# Altium PCB DMC.PcbDoc
Units mm, origin at the board's own origin, x right, y up, seen from the top; angles counter-clockwise.
Board outline 40.92 x 29.24 mm, 4 copper layers (Top Layer, GND, VCC, Bottom Layer), stack 0.603 mm thick; 34 components, 28 nets, 167 pads, 43 vias.
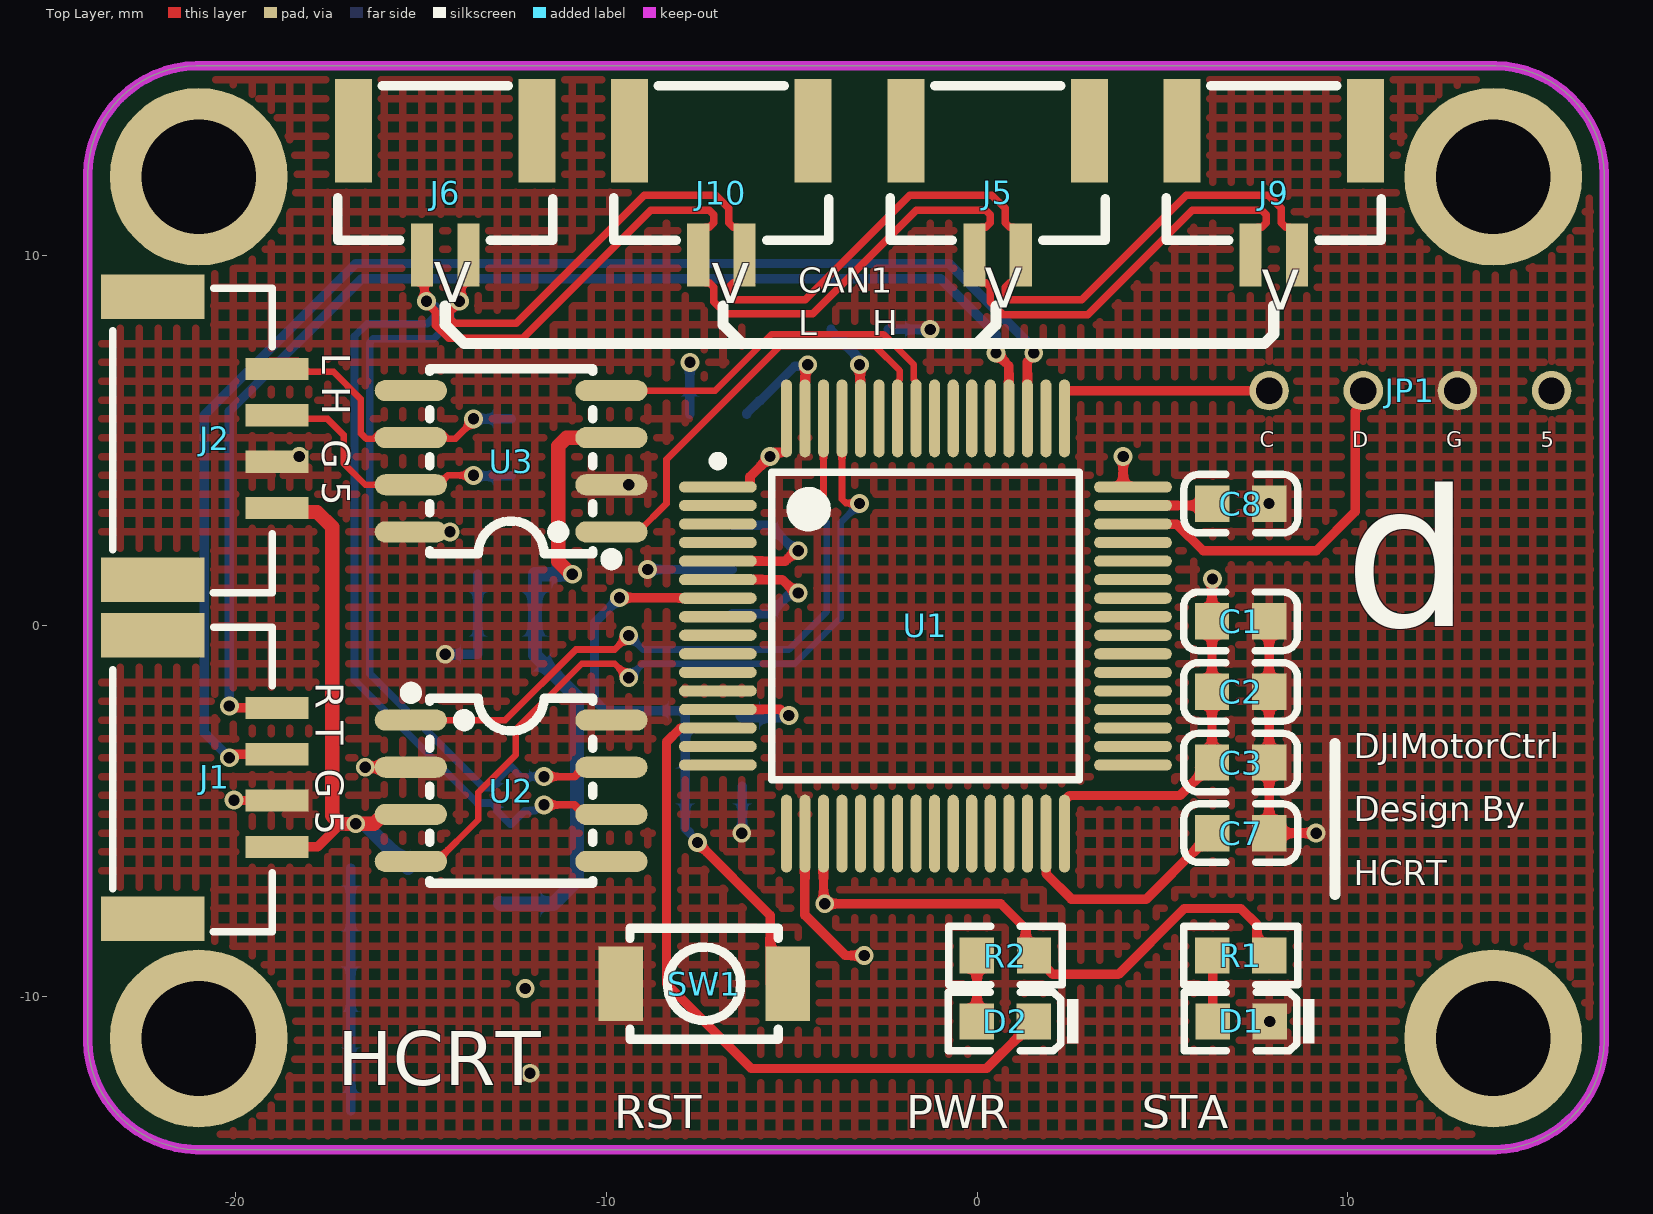
[diagram p0: Top Layer view]
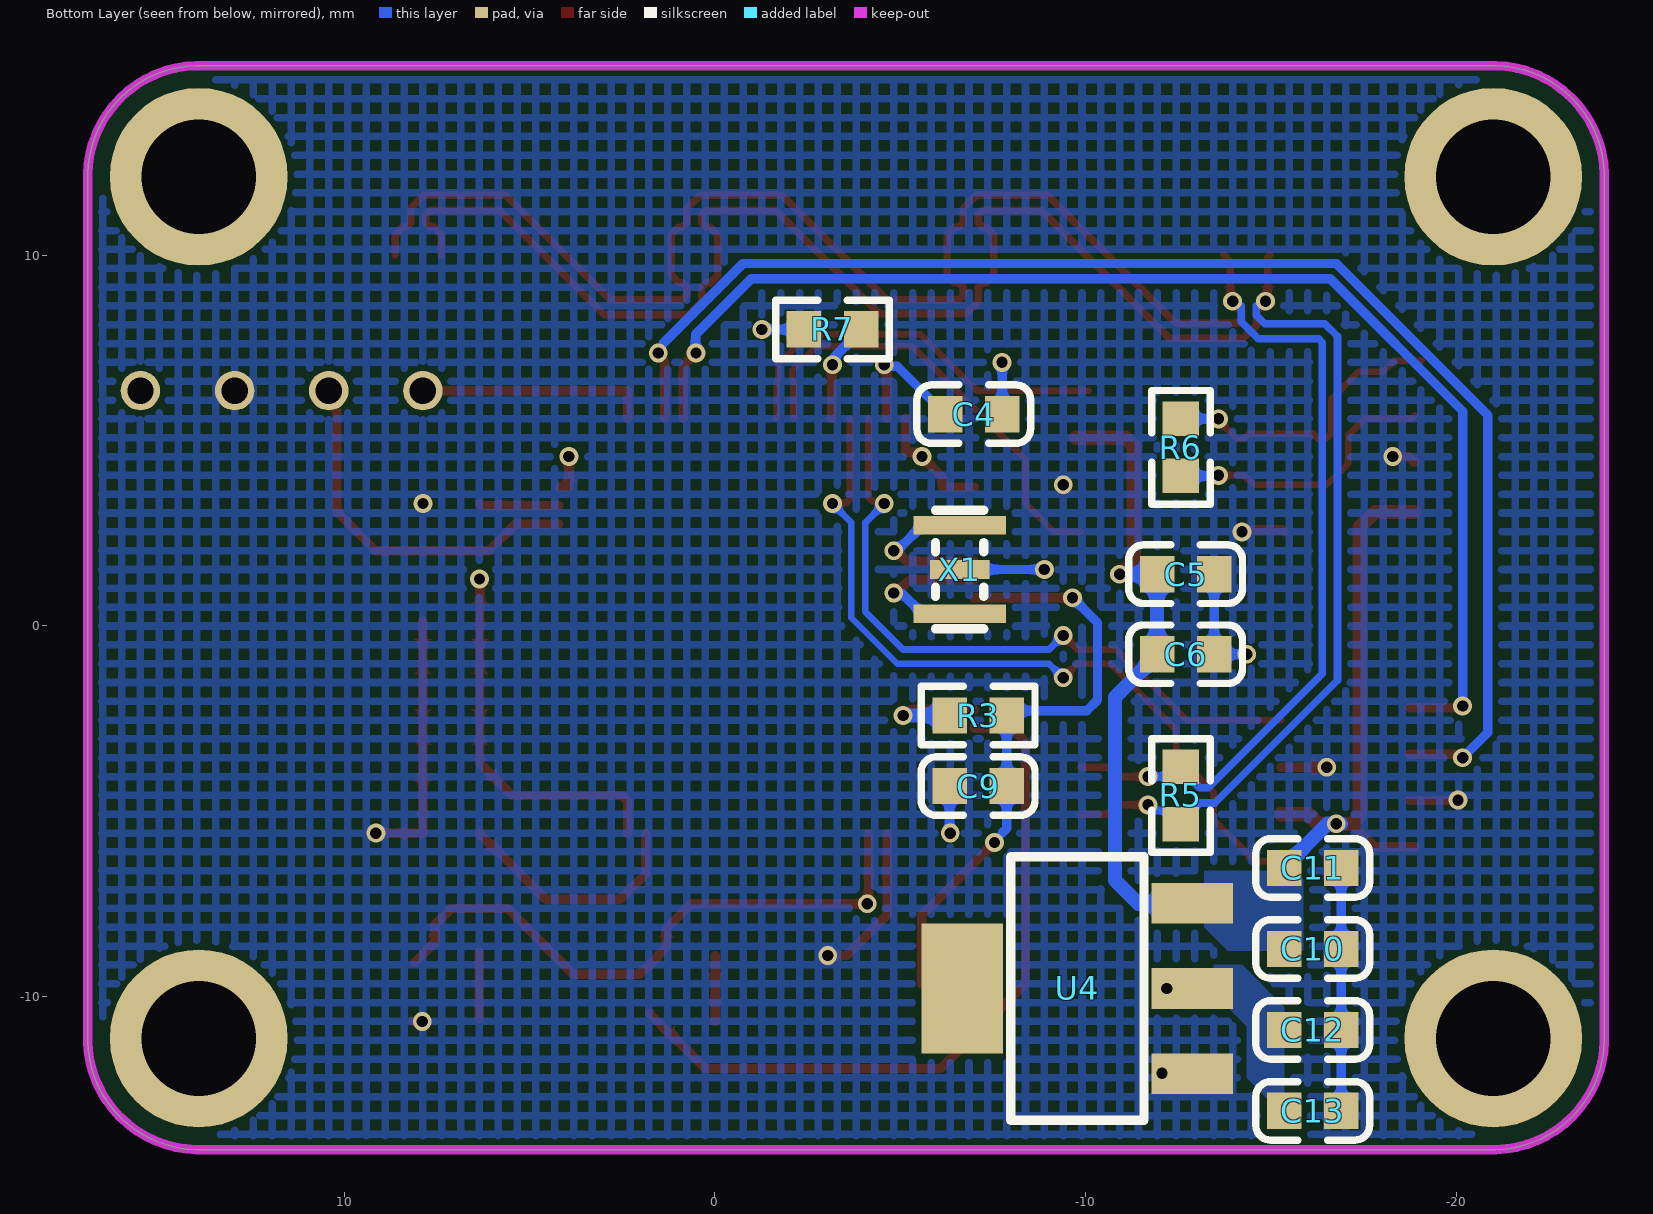
[diagram p1: Bottom Layer view, seen from below]
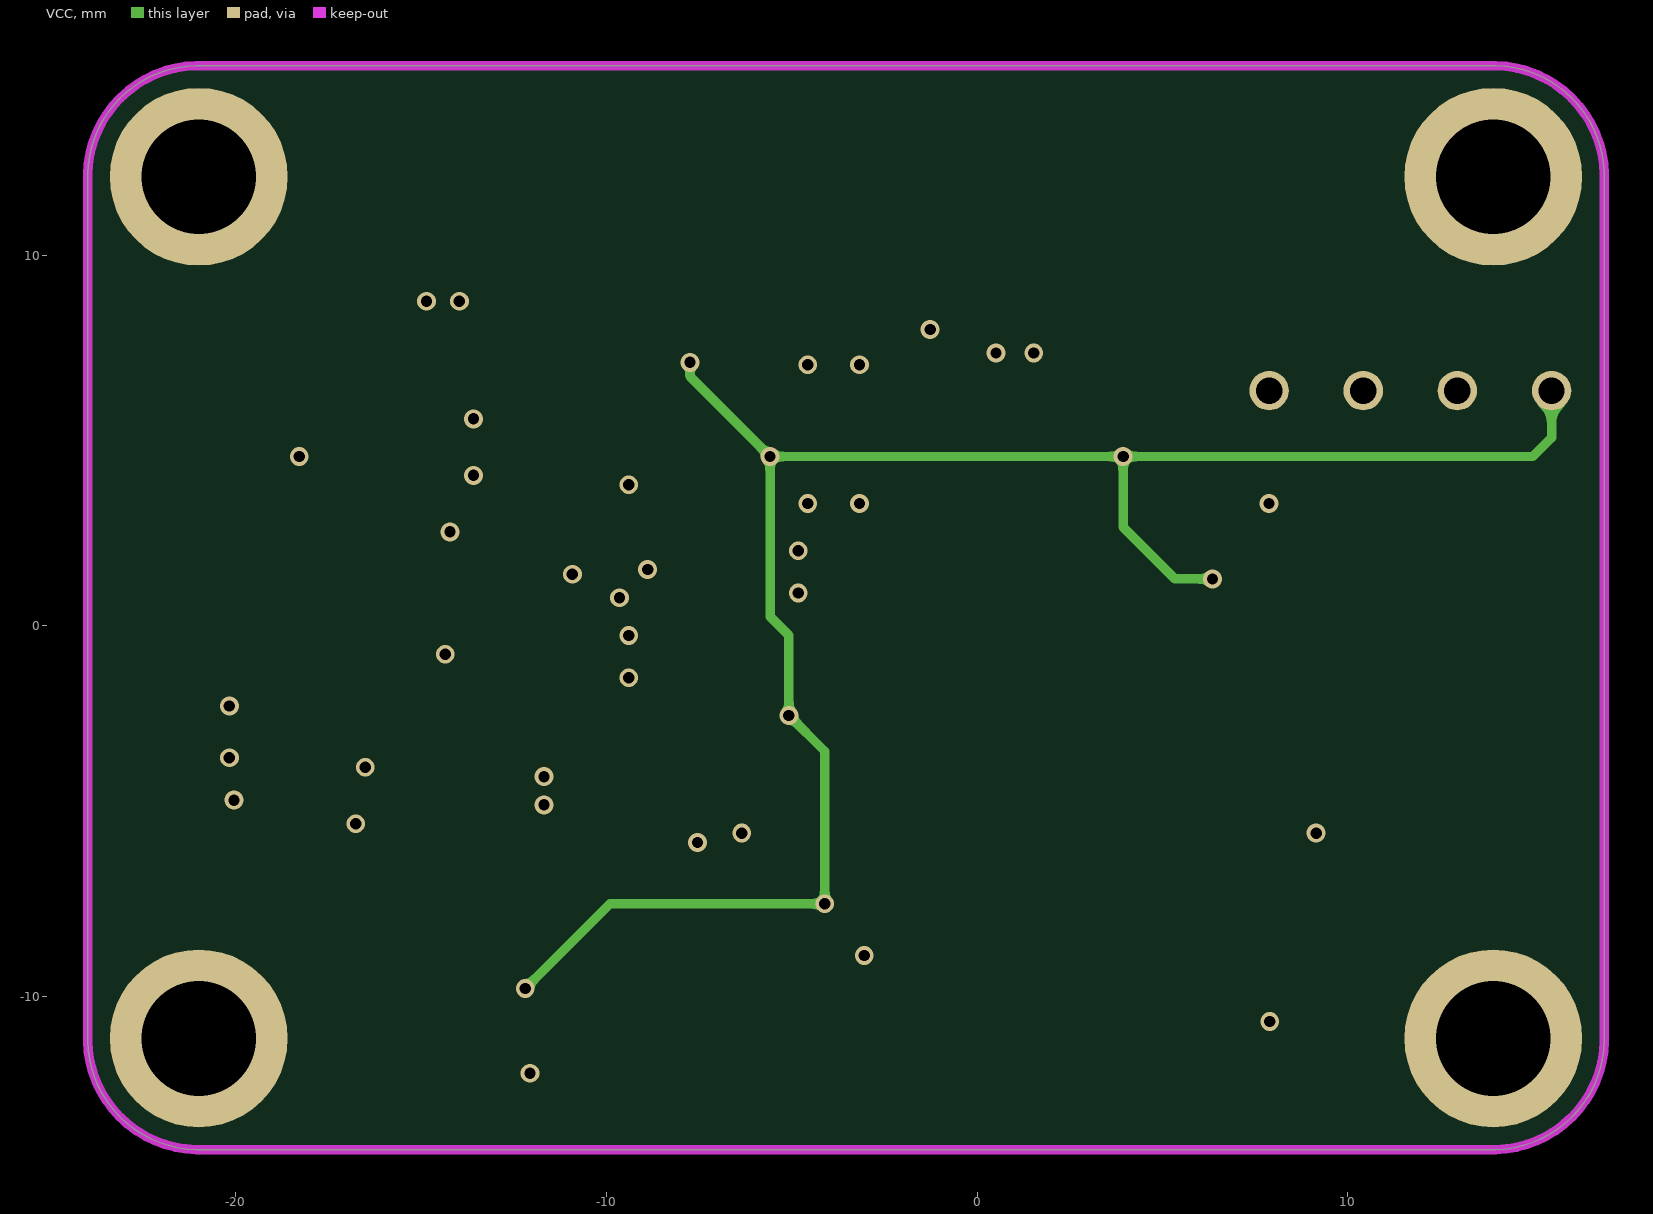
[diagram p2: VCC]
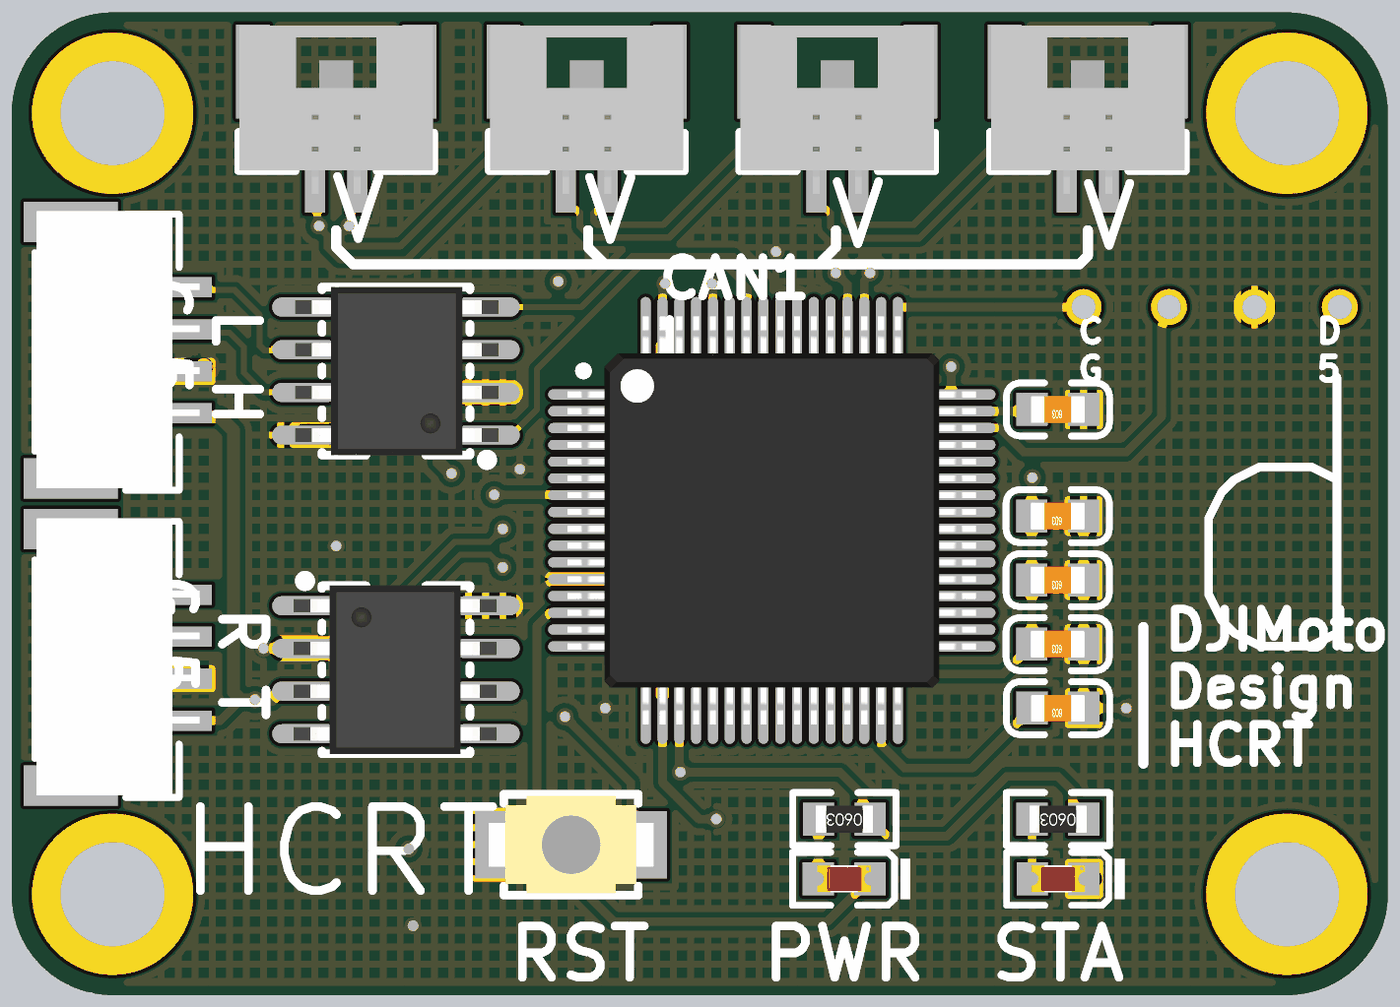
[diagram p3: 3D render of the assembled board from above, using the file's embedded part models]
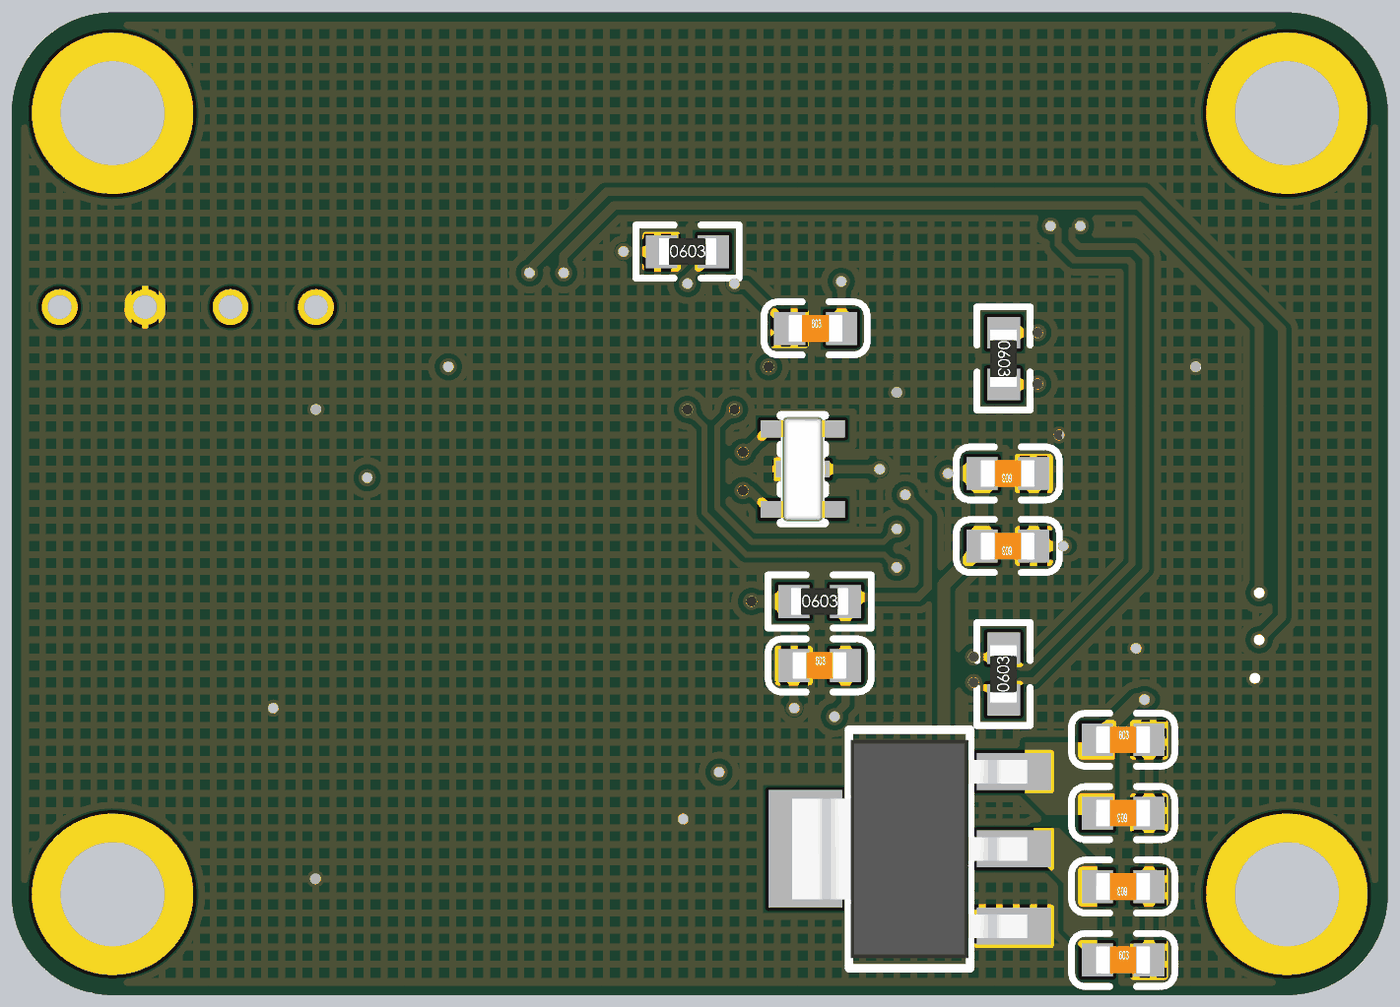
[diagram p4: 3D render of the assembled board from below, using the file's embedded part models]

## Layer stack, top to bottom
Top Solder: solder mask 0.0102, Solder Resist, Dk 3.5
Top Layer: signal copper 0.0356
Dielectric 2: prepreg 0.0711, PP-006, Dk 4.1
GND: signal copper 0.035
Dielectric 1: dielectric 0.32, FR-4, Dk 4.8
VCC: signal copper 0.035
Dielectric 3: prepreg 0.0711, PP-006, Dk 4.1
Bottom Layer: signal copper 0.0356
Bottom Solder: solder mask 0.0102, Solder Resist, Dk 3.5

## Board outline
-21.065,-14.126 cw(c-21,-11.127) -23.999,-11.19 -23.999,12.184 cw(c-21,12.119) -21.063,15.118 13.986,15.118 cw(c13.921,12.119) 16.92,12.182 16.92,-11.192 cw(c13.921,-11.127) 13.984,-14.126

## Design rules (kind name [scope] priority, off if disabled: settings)
Clearance [All] p1: gap=0.152 ignorepadtopadclearanceinfootprint=FALSE
DiffPairsRouting DiffPair_DiffPairsRouting [InDifferentialPair ('NewDifferentialPair1')] p1: maxlimit=0.254 minlimit=0.178 mostfreqgap=0.203 toplayer_minwidth=0.152 toplayer_maxwidth=0.254 toplayer_prefwidth=0.178 midlayer1_minwidth=0.152 midlayer1_maxwidth=0.254 midlayer1_prefwidth=0.178 midlayer2_minwidth=0.152 midlayer2_maxwidth=0.254 midlayer2_prefwidth=0.178 bottomlayer_minwidth=0.152 bottomlayer_maxwidth=0.254 bottomlayer_prefwidth=0.178 maxuncoupledlength=12.7
DiffPairsRouting [All] p2: maxlimit=0.254 minlimit=0.203 mostfreqgap=0.203 toplayer_minwidth=0.152 toplayer_maxwidth=0.203 toplayer_prefwidth=0.178 midlayer1_minwidth=0.152 midlayer1_maxwidth=0.203 midlayer1_prefwidth=0.178 midlayer2_minwidth=0.152 midlayer2_maxwidth=0.203 midlayer2_prefwidth=0.178 bottomlayer_minwidth=0.152 bottomlayer_maxwidth=0.203 bottomlayer_prefwidth=0.178 maxuncoupledlength=12.7
MatchedLengths DiffPair_MatchedLengths [InDifferentialPair ('NewDifferentialPair1')] p1: tolerance=25.4 checknetsindiffpair=FALSE checkdiffpairvsdiffpair=TRUE checkxsignals=TRUE checkothers=TRUE
PolygonConnect [All] p1: connectstyle=Direct reliefconductorwidth=0.254 reliefentries=4 polygonreliefangle="90 Angle" airgapwidth=0.254
RoutingVias [All] p1: holewidth=0.711 width=1.27 viastyle="Through Hole" minholewidth=0.711 minwidth=1.27 maxholewidth=0.711 maxwidth=1.27
SolderMaskExpansion [All] p1: expansion=0.102 istentingtop=FALSE
Width [All] p1: maxlimit=0.381 minlimit=0.152 preferedwidth=0.254
29 further rules are at their usual default settings.

## Components (designator, comment, footprint, x,y, rotation, side; value= is the part's Value field where it differs from the comment)
C1 "2.2uF (225) 10% 16V" 0603_C 7.104,0.127 r180 top
C2 "2.2uF (225) 10% 16V" 0603_C 7.104,-1.778 r180 top
C3 "2.2uF (225) 10% 16V" 0603_C 7.104,-3.683 r180 top
C4 "2.2uF (225) 10% 16V" 0603_C -6.985,5.715 r180 bottom
C5 "100nF (104) 10% 50V" 0603_C -12.7,1.397 r0 bottom
C6 "100nF (104) 10% 50V" 0603_C -12.7,-0.762 r0 bottom
C7 "2.2uF (225) 10% 16V" 0603_C 7.112,-5.588 r180 top
C8 "2.2uF (225) 10% 16V" 0603_C 7.112,3.302 r180 top
C9 "100nF (104) 10% 50V" 0603_C -7.104,-4.318 r180 bottom
C10 "10uF (106) 10% 10V" 0603_C -16.129,-8.712 r0 bottom
C11 "100nF (104) 10% 50V" 0603_C -16.129,-6.528 r180 bottom
C12 "10uF (106) 10% 10V" 0603_C -16.129,-10.897 r0 bottom
C13 "100nF (104) 10% 50V" 0603_C -16.129,-13.081 r180 bottom
D1 "白灯 0603" 0603_LED_S1 7.12,-10.668 r180 top
D2 "白灯 0603" 0603_LED_S1 0.754,-10.668 r180 top
J1 "GH1.25-4P" GH1.25-4P -21.336,-3.81 r180 top
J2 "GH1.25-4P" GH1.25-4P -21.336,5.334 r180 top
J5 "GH1.25立贴2P" CONN-SMD_2P-V-P1.25-L_X1251WVS-02HF-LPSW 0.55,11.684 r180 top
J6 "GH1.25立贴2P" CONN-SMD_2P-V-P1.25-L_X1251WVS-02HF-LPSW -14.351,11.684 r180 top
J9 "GH1.25立贴2P" CONN-SMD_2P-V-P1.25-L_X1251WVS-02HF-LPSW 8.001,11.684 r180 top
J10 "GH1.25立贴2P" CONN-SMD_2P-V-P1.25-L_X1251WVS-02HF-LPSW -6.9,11.684 r180 top
JP1 "下载口4P" 下载口4pin 11.684,6.35 r180 top
R1 "1KΩ (1001) ±1%" 0603_R 7.112,-8.89 r180 top
R2 "1KΩ (1001) ±1%" 0603_R 0.762,-8.89 r180 top
R3 "1KΩ (1001) ±1%" 0603_R -7.104,-2.413 r180 bottom
R5 "120Ω (1200) ±1%" 0603_R -12.573,-4.572 r90 bottom
R6 "120Ω (1200) ±1%" 0603_R -12.573,4.818 r270 bottom
R7 "1KΩ (1001) ±1%" 0603_R -3.175,8.001 r180 bottom
SW1 "TSA343G00-250J2" SW-SMD_L4.0-W2.9-LS5.0 -7.366,-9.652 r180 top
U1 "STM32F405RGT6" TQFP64_M -1.397,0 r0 top
U2 "TJA1050" SOIC-8_L5.0-W4.0-P1.27-LS6.0-BL -12.573,-4.445 r270 top
U3 "TJA1050" SOIC-8_L5.0-W4.0-P1.27-LS6.0-BL -12.573,4.445 r90 top
U4 "AMS1117" SOT-223_L6.7-W3.5-P2.30-BR -9.779,-9.779 r180 bottom
X1 "8MHz" OSC-SMD_3P-L3.2-W1.3-P1.2-L -6.604,1.524 r270 bottom

## Footprints (in the part's own frame and the unit in brackets; to place one, negate y for a bottom-side part, rotate by r counter-clockwise, add the part's x,y. Pads: shape width x height; smd on the part's side, far side on the other; paste and mask are expansions set on the pad)
0603_C [mm]
  rect 0.93x0.98 smd: 1(-0.77,0) 2(0.77,0)
  silkscreen extent -1.53,-0.79 1.54,0.79, body extent -0.8,-0.4 0.8,0.4, height 0.3
0603_LED_S1 [mm]
  rect 0.93x0.98 smd: A(0.77,0) K(-0.77,0)
  silkscreen extent -1.98,-0.79 1.54,0.79, body extent -0.8,-0.4 0.8,0.4, height 0.6
0603_R [mm]
  rect 0.93x0.98 smd: 1(-0.77,0) 2(0.77,0)
  silkscreen extent -1.53,-0.79 1.54,0.79, body extent -0.85,-0.4 0.85,0.4, height 0.56
CONN-SMD_2P-V-P1.25-L_X1251WVS-02HF-LPSW [mm]
  rect 0.6x1.7 smd: 1(-0.625,1.675) 2(0.625,1.675)
  rect 1x2.8 smd: 3(2.475,-1.675) 4(-2.475,-1.675)
  silkscreen extent -2.9,-2.9 2.9,1.27, body extent -2.87,-3.04 2.88,1.96, height 4.1
GH1.25-4P [mm]
  rect 2.8x1.2 smd: 0(0.907,4.085) 0(0.907,-3.554)
  rect 1.7x0.6 smd: 1(-2.443,2.149) 2(-2.443,0.9) 3(-2.443,-0.351) 4(-2.443,-1.601)
  silkscreen extent -2.32,-3.78 1.98,4.44, body extent -2.92,-3.87 1.93,4.38, height 4.25
OSC-SMD_3P-L3.2-W1.3-P1.2-L [mm]
  rect 0.5x2.5 smd: 1(-1.199,0) 3(1.199,0)
  rect 0.5x1.6 smd: 2(0,0)
  silkscreen extent -1.6,-0.65 1.6,0.65, body extent -1.6,-0.66 1.6,0.66, height 0.7
SOIC-8_L5.0-W4.0-P1.27-LS6.0-BL [mil]
  oval 22.38x76.78 smd: 1(-75,-106.5) 2(-25,-106.5) 3(25,-106.5) 4(75,-106.5) 5(75,106.5) 6(25,106.5) 7(-25,106.5) 8(-75,106.5)
  silkscreen extent -110,-112 98,87, body extent -99,-120 99,118, height 63
SOT-223_L6.7-W3.5-P2.30-BR [mm]
  rect 2.2x1.1 smd: 1(3.099,-2.3) 2(3.099,0) 3(3.099,2.3)
  rect 2.2x3.5 smd: 4(-3.099,0)
  silkscreen extent -1.8,-3.55 1.8,3.55, body extent -3.5,-3.25 3.5,3.25, height 1.65
SW-SMD_L4.0-W2.9-LS5.0 [mm]
  rect 1.2x2 smd: 1(-2.25,0) 2(2.25,0)
  silkscreen extent -2,-1.5 2,1.5, body extent -2.45,-1.45 2.45,1.45, height 2
TQFP64_M [mm] "Thin QFP, 64-Leads, Body 10x10mm, Pitch 0.5mm, IPC Low Density"
  oval 2.1x0.3 smd: 1(-5.6,3.75) 2(-5.6,3.25) 3(-5.6,2.75) 4(-5.6,2.25) 5(-5.6,1.75) 6(-5.6,1.25) 7(-5.6,0.75) 8(-5.6,0.25) 9(-5.6,-0.25) 10(-5.6,-0.75) 11(-5.6,-1.25) 12(-5.6,-1.75) 13(-5.6,-2.25) 14(-5.6,-2.75) 15(-5.6,-3.25) 16(-5.6,-3.75) 33(5.6,-3.75) 34(5.6,-3.25) 35(5.6,-2.75) 36(5.6,-2.25) 37(5.6,-1.75) 38(5.6,-1.25) 39(5.6,-0.75) 40(5.6,-0.25) 41(5.6,0.25) 42(5.6,0.75) 43(5.6,1.25) 44(5.6,1.75) 45(5.6,2.25) 46(5.6,2.75) 47(5.6,3.25) 48(5.6,3.75)
  oval 0.3x2.1 smd: 17(-3.75,-5.6) 18(-3.25,-5.6) 19(-2.75,-5.6) 20(-2.25,-5.6) 21(-1.75,-5.6) 22(-1.25,-5.6) 23(-0.75,-5.6) 24(-0.25,-5.6) 25(0.25,-5.6) 26(0.75,-5.6) 27(1.25,-5.6) 28(1.75,-5.6) 29(2.25,-5.6) 30(2.75,-5.6) 31(3.25,-5.6) 32(3.75,-5.6) 49(3.75,5.6) 50(3.25,5.6) 51(2.75,5.6) 52(2.25,5.6) 53(1.75,5.6) 54(1.25,5.6) 55(0.75,5.6) 56(0.25,5.6) 57(-0.25,5.6) 58(-0.75,5.6) 59(-1.25,5.6) 60(-1.75,5.6) 61(-2.25,5.6) 62(-2.75,5.6) 63(-3.25,5.6) 64(-3.75,5.6)
  silkscreen extent -5.72,-4.15 4.15,4.57, body extent -6.07,-6.07 6.07,6.07, height 1.62
下载口4pin [mil]
  round 42 hole 28: 1(-150,0) 2(-50,0) 3(50,0) 4(150,0)

## Part data
C1 C2 C3 C4 C7 C8: library part "0603 2.2uF (225) 10% 16V", "贴片电容", Package=0603, SuppliersPartNumber=C23630, ComponentLink1Description=供应商链接, ComponentLink1URL=http://www.szlcsc.com/product/details_24366.html, Supplier=LC
C5 C6 C9 C11 C13: library part "0603 100nF (104) 10% 50V", "贴片电容", Package=0603, SuppliersPartNumber=C14663, ComponentLink1Description=供应商链接, ComponentLink1URL=http://www.szlcsc.com/product/details_15331.html, Supplier=LC
C10 C12: library part "0603 10uF (106) 10% 10V", "贴片电容", Package=0603, SuppliersPartNumber=C19702, ComponentLink1Description=供应商链接, ComponentLink1URL=http://www.szlcsc.com/product/details_20411.html, Supplier=LC
D1 D2: library part "0603 白灯", "发光二极管", Package=0603, SuppliersPartNumber=C2290, ComponentLink1Description=供应商链接, ComponentLink1URL=http://www.szlcsc.com/product/details_2663.html, Supplier=LC
J1 J2: "GH1.25-4P 卧"
JP1: library part 接插件-下载口4P, "下载口4PIN SWD"
R1 R2 R3 R7: library part "0603 1KΩ (1001) 1%", "贴片电阻", Package=0603, SuppliersPartNumber=C21190, ComponentLink1Description=供应商链接, ComponentLink1URL=http://www.szlcsc.com/product/details_21904.html, Supplier=LC
R5 R6: library part "0603 120Ω (1200) 1%", "贴片电阻", Package=0603, SuppliersPartNumber=C22787, ComponentLink1Description=供应商链接, ComponentLink1URL=http://www.szlcsc.com/product/details_23514.html, Supplier=LC
SW1: "贴片轻触开关", BOM_Manufacturer=BRIGHT, BOM_Manufacturer Part=TSA343G00-250J2, BOM_Supplier=LCSC, BOM_Supplier Part=C354946, Contributor=LCSC, spicePre=S, spiceSymbolName=TSA343G00-250J2
U1: "ARM Cortex-M4 32b MCU+FPU, 210DMIP, 1024 kB Flash, 192+4 kB RAM, 51 I/Os, 64-pin LQFP, -40 to +85癈, Tray", Operating Frequency (Processor Speed)=168MHz, 16-bit Timers (IC/OC/PWM)=12x16-bit(24/24/30), 32-bit Timer (IC/OC/PWM)="2x32-bit (8/8/8)", A/D Converter=16x12-bit, ComponentLink1Description="Manufacturer URL", ComponentLink1URL=http://www.st.com/, ComponentLink2Description="STM32F405/7 Datasheet", ComponentLink2URL=http://www.st.com/internet/com/TECHNICAL_RESOURCES/TECHNICAL_LITERATURE/DATASHEET/DM00037051.pdf, ComponentLink3Description="STM32F4 Web Page", ComponentLink3URL=http://www.st.com/internet/mcu/subclass/1521.jsp, D/A Converter=2x12-bit, DatasheetVersion="rev2, Jan-2012", Internal RAM=192kB, Other Timer Functions="2xWDG, RTC, 24-bit down counter", PackageDescription="64-Pin Low Profile Quad Flat Package, 10x10 mm Body, 0.5 mm Pitch", PackageReference=TQFP64, PackageVersion=2012, Serial Interface="3xSPI/2xI2S/2xI2C/3xUSART(IrDa, ISO7816)/3xUART/1xUSB OTG FS/HS, 2xCAN/ SDIO"
X1: library part 8MHz-3P, BOM_JLCPCB SMD=Yes, BOM_Manufacturer=MuRata, BOM_Manufacturer Part=CSTCE8M00G15C99-R0, BOM_Supplier=LCSC, BOM_Supplier Part=C110614, nameAlias=Frequency, SMT Type=Extend, spicePre=X, spiceSymbolName=CSTCE8M00G15C99-R0

## Free pads (board coordinates)
  round 4.8 hole 3.1: 5(-21,-11.127) 5(-21,12.119) 5(13.921,-11.127) 5(13.921,12.119)

## Via types
v1: diameter 0.508, hole 0.305, Top Layer to Bottom Layer, tented both sides, 43 vias

## Nets (pads, with @x,y where several pads share a name; then routed paths per layer and width w, separated by ;. In a path a pad name is that pad's centre, name@x,y a point inside that pad or via, vN(x,y) a via of type N, cw(c..) or ccw(c..) an arc to the next point about the centre after c; other vN are vias at no path point)
+5: C5.2 C6.2 C10.2 C11.1 J1.1 J2.1 U2.3 U3.3 U4.3 | length 33.1
  Top Layer w0.254: J1.1 -17.794,-5.959 -17.176,-5.34
  Top Layer w0.381: J2.1@-18.875,3.075 -17.807,3.075 -17.399,2.667 -17.399,-5.117 -17.176,-5.34 -16.77,-5.34 v1(-16.764,-5.334) -16.274,-5.334 -16.02,-5.08 U2.3 ; v1(-10.922,1.397) -10.956,1.397 -11.303,1.744 -11.303,4.857 -11.08,5.08 U3.3@-9.743,5.08
  Bottom Layer w0.381: v1@-16.891,-5.334 v1(-16.764,-5.334) -16.528,-5.334 -15.359,-6.503 C11.1 ; U4.3 -12.864,-7.493 -11.43,-7.493 -10.795,-6.858 -10.795,-1.922 -11.93,-0.787 C6.2 C5.2 v1(-10.922,1.397)
CAN1_H: J5.1 J6.1 J9.1 J10.1 R5.2 U2.7 | length 56.2
  Top Layer w0.203: J6.1 -13.912,9.823 -13.912,8.821 v1(-13.97,8.763) -13.97,8.733 -14.211,8.492 -14.211,8.286 -14.092,8.167 -12.434,8.167 -8.979,11.622 -7.054,11.622 -6.697,11.265 -6.697,10.876 -6.578,10.757 -6.474,10.757 -6.275,10.559 J10.1 -6.275,9.459 -6.474,9.261 -6.578,9.261 -6.697,9.142 -6.697,8.922 -6.578,8.803 -4.634,8.803 -1.815,11.622 0.396,11.622 0.754,11.265 0.754,10.876 0.873,10.757 0.977,10.757 1.175,10.559 J5.1 1.175,9.459 0.977,9.261 0.873,9.261 0.754,9.142 0.754,8.922 0.873,8.803 2.817,8.803 5.636,11.622 7.847,11.622 8.204,11.265 8.204,10.876 8.323,10.757 8.428,10.757 8.626,10.559 J9.1 ; v1(-11.684,-4.064) -10.86,-4.064 -10.606,-3.81 U2.7
  Bottom Layer w0.203: v1(-13.97,8.763) -14.052,8.763 -14.179,8.636 -14.199,8.636 -14.199,8.214 -14.665,7.747 -16.287,7.747 -16.392,7.642 -16.392,-1.294 -13.317,-4.369 -13.08,-4.369 -12.961,-4.25 -12.961,-4.165 -12.598,-3.802 R5.2 -12.311,-4.064 v1(-11.684,-4.064)
CAN1_L: J5.2 J6.2 J9.2 J10.2 R5.1 U2.6 | length 56.9
  Top Layer w0.203: J6.2 -14.917,9.95 -14.917,8.821 v1(-14.859,8.763) -14.859,8.733 -14.618,8.492 -14.618,8.118 -14.261,7.76 -12.266,7.76 -8.811,11.215 -7.223,11.215 -7.103,11.096 -7.103,10.876 -7.223,10.757 -7.327,10.757 -7.525,10.559 J10.2 -7.525,9.459 -7.327,9.261 -7.223,9.261 -7.103,9.142 -7.103,8.753 -6.77,8.42 -4.442,8.42 -1.646,11.215 0.228,11.215 0.347,11.096 0.347,10.876 0.228,10.757 0.124,10.757 -0.075,10.559 J5.2 -0.075,9.459 0.124,9.261 0.228,9.261 0.347,9.142 0.347,8.753 0.704,8.396 2.985,8.396 5.804,11.215 7.679,11.215 7.798,11.096 7.798,10.876 7.679,10.757 7.574,10.757 7.376,10.559 J9.2 ; v1(-11.684,-4.826) -10.86,-4.826 -10.606,-5.08 U2.6
  Bottom Layer w0.203: v1(-14.859,8.763) -14.777,8.763 -14.65,8.636 -14.605,8.636 -14.605,8.382 -14.834,8.153 -16.456,8.153 -16.798,7.81 -16.798,-1.462 -13.485,-4.775 -13.08,-4.775 -12.961,-4.894 -12.961,-4.979 -12.598,-5.342 R5.1 -12.21,-4.979 -11.919,-4.979 -11.766,-4.826 v1(-11.684,-4.826)
CAN1_R: U1.61 U2.4 | length 21.5
  Top Layer w0.178: U2.4 -14.587,-6.35 -13.462,-5.225 -13.462,-4.491 -12.446,-3.475 -12.446,-2.794 -10.668,-1.016 -9.779,-1.016 v1(-9.398,-1.397) ; U1.61 -3.647,3.419 -3.543,3.315 -3.188,3.315 v1(-3.175,3.302)
  Bottom Layer w0.178: v1(-9.398,-1.397) -9.017,-1.016 -4.922,-1.016 -3.683,0.223 -3.683,2.794 v1(-3.175,3.302)
CAN1_T: U1.62 U2.1 | length 18.5
  Top Layer w0.178: U2.1 -12.731,-2.54 -10.826,-0.635 -9.779,-0.635 v1(-9.398,-0.254) ; v1(-4.572,3.302) -4.512,3.362 -4.251,3.362 -4.147,3.466 U1.62
  Bottom Layer w0.178: v1(-9.398,-0.254) -9.017,-0.635 -5.08,-0.635 -4.064,0.381 -4.064,2.794 v1(-4.572,3.302)
CAN2_H: J2.3 R6.2 U3.7 | length 8.3
  Top Layer w0.178: J2.3 -18.796,5.588 -17.526,5.588 -17.091,5.153 -17.091,4.391 -16.51,3.81 U3.7@-15.887,3.81 ; v1(-13.589,4.064) -14.288,4.064 -14.542,3.81 U3.7 ; U3.7@-15.887,3.81 U3.7 ; U3.7@-15.887,3.81 U3.7
  Bottom Layer w0.254: v1(-13.589,4.064) -13.573,4.048 R6.2
CAN2_L: J2.4 R6.1 U3.6 | length 8.3
  Top Layer w0.178: J2.4@-19.064,7.152 -18.328,7.152 -18.034,6.858 -17.366,6.858 -16.634,6.126 -16.634,5.203 -16.485,5.055 -16.275,5.055 -16.126,5.203 -16.113,5.191 -15.22,5.191 -15.207,5.203 -15.194,5.191 -14.443,5.191 -14.43,5.203 -14.281,5.055 -14.071,5.055 -13.589,5.536 v1(-13.589,5.588)
  Bottom Layer w0.254: v1(-13.589,5.588) R6.1
CAN2_R: U1.57 U3.4 | length 10.8
  Top Layer w0.178: U3.4@-10.091,6.35 -7.067,6.35 -5.543,7.874 -2.531,7.874 -1.706,7.049 -1.706,6.646 -1.67,6.61 -1.67,5.623 U1.57
CAN2_T: U1.58 U3.1 | length 12.1
  Top Layer w0.178: U3.1 -9.144,2.54 -8.382,3.302 -8.382,4.496 -5.334,7.544 -2.74,7.544 -2.087,6.891 -2.087,6.646 -2.124,6.61 -2.124,5.623 U1.58
GND: C1.1 C2.1 C3.1 C4.1 C5.1 C6.1 C7.1 C8.1 C9.1 C10.1 C11.2 C12.1 C13.2 D1.K J1.2 J2.2 JP1.2 R7.1 SW1.2 U1.12 U1.18 U1.63 U2.2 U2.8 U3.2 U3.8 U4.1 X1.2 | length 33.7
  Top Layer w0.254: v1(-20.048,-4.697) -20.037,-4.708 J1.2@-18.748,-4.708 ; J2.2 -18.874,4.415 -18.717,4.572 v1(-18.288,4.572) ; v1(-16.51,-3.81) U2.2 ; U3.8@-15.364,2.54 -15.304,2.6 -14.284,2.6 v1(-14.224,2.54) ; U1.18 -4.647,-7.799 -3.556,-8.89 v1(-3.048,-8.89) ; U1.63 -4.638,5.609 -4.638,6.914 -4.572,6.98 v1(-4.572,7.048) ; C1.1 C2.1 C3.1 7.874,-5.58 C7.1 v1@8.89,-5.588 ; v1(7.89,-10.668) D1.K@8.144,-10.668
  Bottom Layer w0.254: C13.2 C12.1 C10.1 C11.2 ; v1@-14.478,-0.762 C6.1 C5.1 ; v1(-8.89,1.524) X1.2 ; v1(-6.35,-5.588) -6.334,-5.572 C9.1 ; C4.1 -6.215,5.74 -5.877,6.078 -5.852,6.078 -4.922,7.008 -4.612,7.008 v1(-4.572,7.048) ; R7.1 v1(-1.27,8.001)
  other v1: -12.065,-12.065 9.144,-5.588 -14.351,-0.762 7.874,3.302 -9.398,3.81
LED1: D2.K U1.14 | length 19.8
  Top Layer w0.254: U1.14 -7.006,-2.759 -8.013,-2.759 -8.382,-3.128 -8.382,-9.652 -6.096,-11.938 0.254,-11.938 1.161,-11.031 1.186,-11.031 1.743,-10.475 D2.K@1.743,-10.449
NetC7_2: C7.2 U1.31 | length 6.6
  Top Layer w0.254: U1.31 1.862,-5.609 1.862,-6.688 2.54,-7.366 4.564,-7.366 5.979,-5.951 6.004,-5.951 6.342,-5.613 C7.2
NetC8_2: C8.2 U1.47 | length 2.2
  Top Layer w0.254: U1.47 6.29,3.25 C8.2
NetD1_A: D1.A R1.2 | length 1.8
  Top Layer w0.254: D1.A@6.35,-10.58 R1.2@6.35,-8.802
NetD2_A: D2.A R2.2 | length 1.8
  Top Layer w0.254: D2.A -0.008,-10.66 R2.2
NetR7_2: R7.2 U1.60 | length 2.7
  Top Layer w0.254: v1(-3.175,7.048) -3.156,7.029 -3.156,5.609 U1.60
  Bottom Layer w0.254: R7.2 -3.945,7.976 -3.175,7.206 v1(-3.175,7.048)
NetU1_5: U1.5 X1.1 | length 4.4
  Top Layer w0.254: U1.5 -5.177,1.75 -4.895,2.032 v1(-4.826,2.032)
  Bottom Layer w0.254: X1.1 -5.604,2.723 -4.913,2.032 v1(-4.826,2.032)
NetU1_6: U1.6 X1.3 | length 4.3
  Top Layer w0.254: U1.6 -5.256,1.25 -4.895,0.889 v1(-4.826,0.889)
  Bottom Layer w0.254: X1.3 -5.604,0.325 -5.04,0.889 v1(-4.826,0.889)
NRST: C9.2 R3.2 SW1.1 U1.7 | length 16.2
  Top Layer w0.254: v1(-9.652,0.762) -7.009,0.762 U1.7 ; v1(-7.548,-5.842) -5.588,-7.802 SW1.1@-5.588,-9.652
  Bottom Layer w0.254: v1(-9.652,0.762) -10.325,0.089 -10.325,-1.994 -10.033,-2.286 -8.001,-2.286 R3.2 C9.2 -7.874,-5.461 -7.747,-5.588
OLED_SCL: U1.37
OLED_SDA: U1.38
SWCLK: JP1.4 U1.49 | length 6.3
  Top Layer w0.254: U1.49 2.353,6.329 2.374,6.35 JP1.4
SWDIO: JP1.3 U1.46 | length 10.2
  Top Layer w0.254: U1.46 5.378,2.75 6.096,2.032 9.144,2.032 10.195,3.083 10.195,5.795 10.258,5.858 10.258,6.458 JP1.3@10.195,6.521
USART3_RX: J1.4 U1.52 | length 34.6
  Top Layer w0.254: v1(-20.175,-2.157) -20.125,-2.207 J1.4@-18.748,-2.207 ; v1(0.508,7.366) 0.853,7.021 U1.52
  Bottom Layer w0.254: v1(-20.175,-2.157) -20.175,5.793 -16.596,9.373 -0.991,9.373 0.518,7.864 0.518,7.376 v1(0.508,7.366)
USART3_TX: J1.3 U1.51 | length 37.8
  Top Layer w0.254: v1(-20.175,-3.554) -20.078,-3.457 J1.3@-18.748,-3.457 ; U1.51 1.353,7.126 1.524,7.297 v1(1.524,7.366)
  Bottom Layer w0.254: v1@-20.107,-3.622 -20.853,-2.876 -20.853,5.69 -16.764,9.779 -0.762,9.779 1.397,7.62
USB_DM: U1.44
USB_DP: U1.45
VCC: C1.2 C2.2 C3.2 C4.2 C12.2 C13.1 JP1.1 R1.1 R2.1 R3.1 U1.1 U1.13 U1.19 U1.32 U1.48 U1.64 U4.2 | length 88.6
  Top Layer w0.254: U1.13 -5.312,-2.25 -5.149,-2.413 v1(-5.08,-2.413) ; U1.1 -6.153,3.75 -6.132,3.771 -6.132,4.028 v1(-5.588,4.572) -5.519,4.572 -5.4,4.691 -5.168,4.691 -5.147,4.712 U1.64 ; U1.19 -4.147,-7.46 v1(-4.114,-7.493) 0.635,-7.493 1.31,-8.168 1.31,-8.668 R2.1 1.532,-8.915 1.87,-9.253 1.895,-9.253 2.04,-9.398 3.81,-9.398 5.588,-7.62 7.112,-7.62 7.544,-8.052 7.544,-8.527 R1.1@8.092,-9.075 ; U1.32 2.353,-4.712 2.493,-4.572 5.47,-4.572 6.334,-3.708 C3.2 C2.2 C1.2 6.334,1.254 v1(6.35,1.27) ; v1@3.937,4.445 3.937,3.771 3.958,3.75 U1.48
  VCC w0.254: v1(-12.192,-9.779) -9.906,-7.493 v1(-4.114,-7.493) -4.114,-3.379 v1(-5.08,-2.413) -5.08,-0.254 -5.588,0.254 v1(-5.588,4.572) ; v1(-7.747,7.112) -7.747,6.731 v1(-5.588,4.572) ; v1(6.35,1.27) 5.334,1.27 3.937,2.667 v1(3.937,4.572) ; JP1.1 15.494,5.08 14.986,4.572 v1(3.937,4.572) ; v1(-5.588,4.572) v1(3.937,4.572)
  Bottom Layer w0.254: C4.2 -7.755,7.104 v1(-7.747,7.112)
  Bottom Layer w0.381: R3.1 v1(-5.08,-2.413)
pads on no net: J1.0 J2.0 J5.3 J5.4 J6.3 J6.4 J9.3 J9.4 J10.3 J10.4 U1.2 U1.3 U1.4 U1.8 U1.9 U1.10 U1.11 U1.15 U1.16 U1.17 U1.20 U1.21 U1.22 U1.23 U1.24 U1.25 U1.26 U1.27 U1.28 U1.29 U1.30 U1.33 U1.34 U1.35 U1.36 U1.39 U1.40 U1.41 U1.42 U1.43 U1.50 U1.53 U1.54 U1.55 U1.56 U1.59 U2.5 U3.5 U4.4

## Polygon pours and split planes (outlines as drawn)
GND on Bottom Layer "GND_L04_P006" (hatched 90Degree grid 0.508 track 0.203, remove dead copper, pour order 6): -24.892,16.637 -23.495,15.24 18.034,15.24 18.034,-14.605 16.764,-15.875 16.256,-15.367 -25.273,-15.367 -25.273,15.875 -24.892,16.256
+5 on Bottom Layer "+5_L04_P001" (solid, pour order 1): -15.875,-6.604 -15.875,-8.763 -13.843,-8.763 -13.208,-8.128 -13.208,-6.604
VCC on Bottom Layer "VCC_L04_P000" (solid, remove dead copper, pour order 0): -15.359,-13.081 -15.24,-13.081 -14.351,-12.192 -14.351,-10.795 -13.462,-9.906 -13.462,-9.144 -14.224,-9.144 -15.367,-10.287 -15.367,-10.889 -15.359,-10.897
GND on Top Layer "GND_L01_P005" (hatched 90Degree grid 0.508 track 0.203, remove dead copper, pour order 5): -25.019,16.129 -24.511,15.621 18.415,15.621 18.415,-13.462 16.637,-15.24 16.383,-14.986 -25.781,-14.986 -25.781,15.24 -25.273,15.748

## Keep-outs
Keep-Out Layer:
  the board outline again, w0.254

## Silkscreen, mask and mechanical layers (free items; w line width, h text height)
Top Overlay:
  lines w0.3: -14.351,8.636 -14.351,8.128 -13.843,7.62 7.747,7.62 8.001,7.874 8.001,8.636 ; -6.858,8.636 -6.858,8.128 -6.35,7.62 ; 0,7.62 0.508,8.128 0.508,8.636 ; 9.652,-7.239 9.652,-3.175
  text "V" at -14.656,8.374 h1.85
  text "V" at -7.163,8.348 h1.85
  text "V" at 0.203,8.221 h1.85
  text "V" at 7.671,8.171 h1.85
  text "CAN1  / L     H" at -4.826,7.62 h1.14
  text "L H  G 5" at -17.92,7.366 h1.3 r270
  text "C            D            G            5" at 7.62,4.686 h0.7
  text "R T  G 5" at -18.105,-1.524 h1.3 r270
  text "d" at 9.906,-1.524 h8
  text "DJIMotorCtrl" at 10.16,-3.797 h1.14
  text "Design By" at 10.16,-5.5 h1.14
  text "HCRT" at 10.16,-7.226 h1.14
  text "HCRT" at -17.265,-12.875 h2.5
  text "RST" at -9.791,-13.843 h1.52
  text "PWR" at -1.917,-13.843 h1.52
  text "STA" at 4.433,-13.843 h1.52